# Altium PCB HuaYanggui.PcbDoc
Units mil, origin at the board's own origin, x right, y up, seen from the top; angles counter-clockwise.
Board outline 2372.23 x 2949.09 mil, 2 copper layers (Top Layer, Bottom Layer); 30 components, 22 nets, 156 pads, 5 vias.
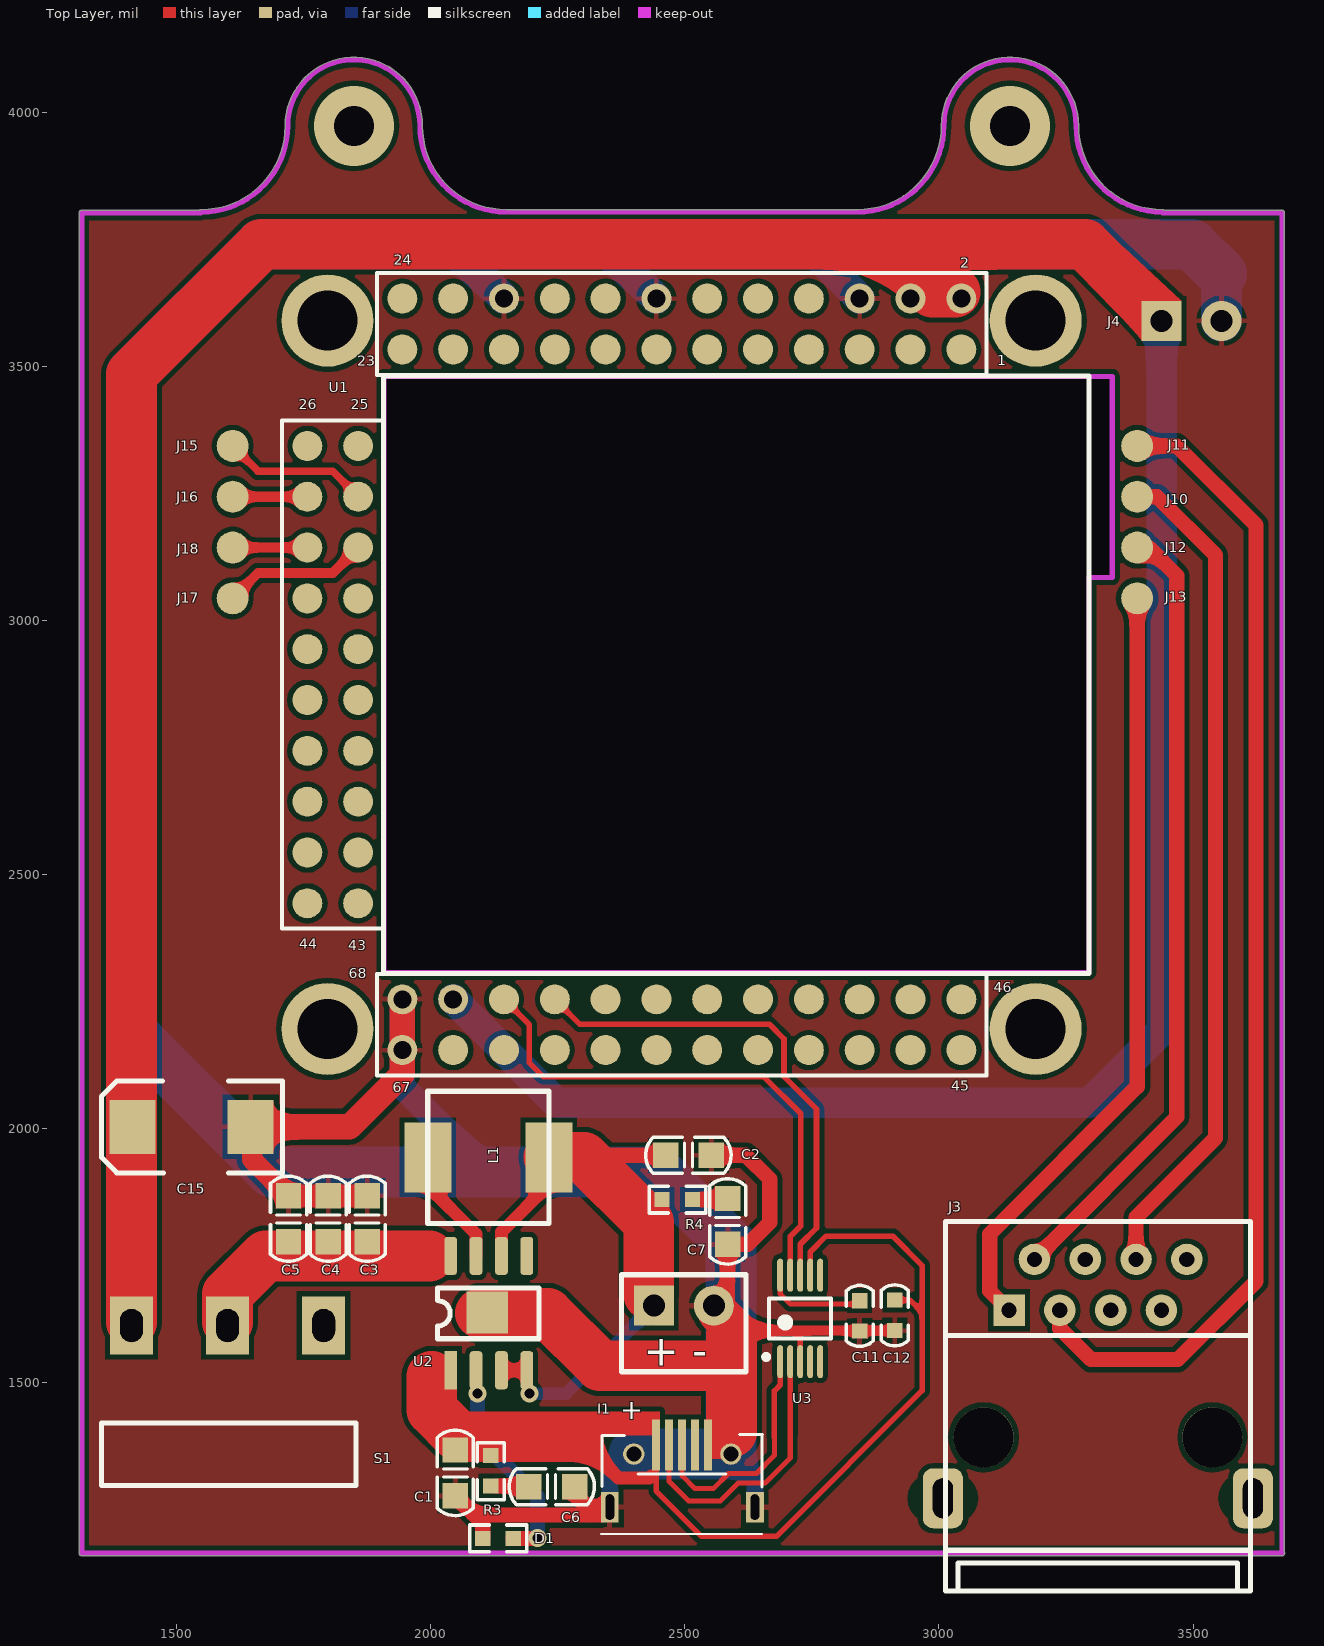
[diagram p0: Top Layer view]
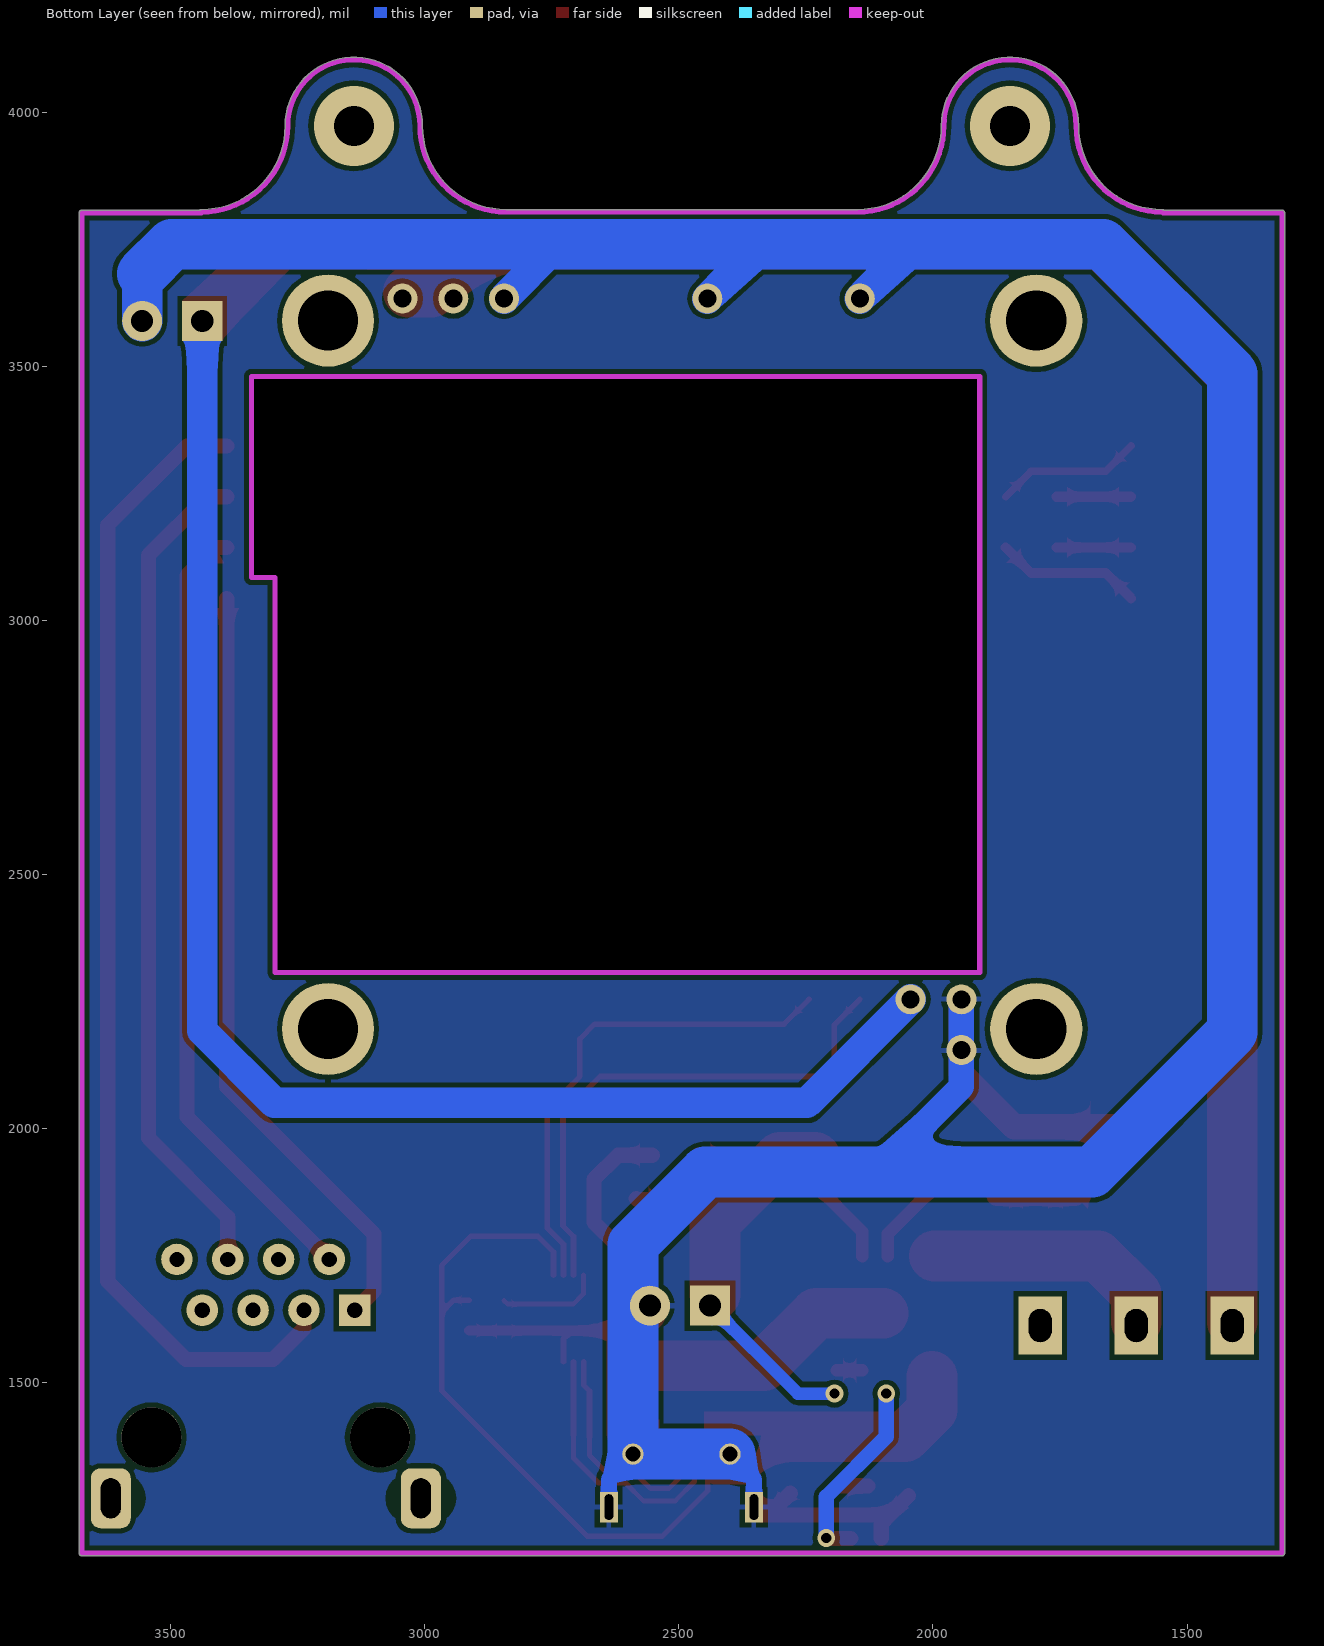
[diagram p1: Bottom Layer view, seen from below]
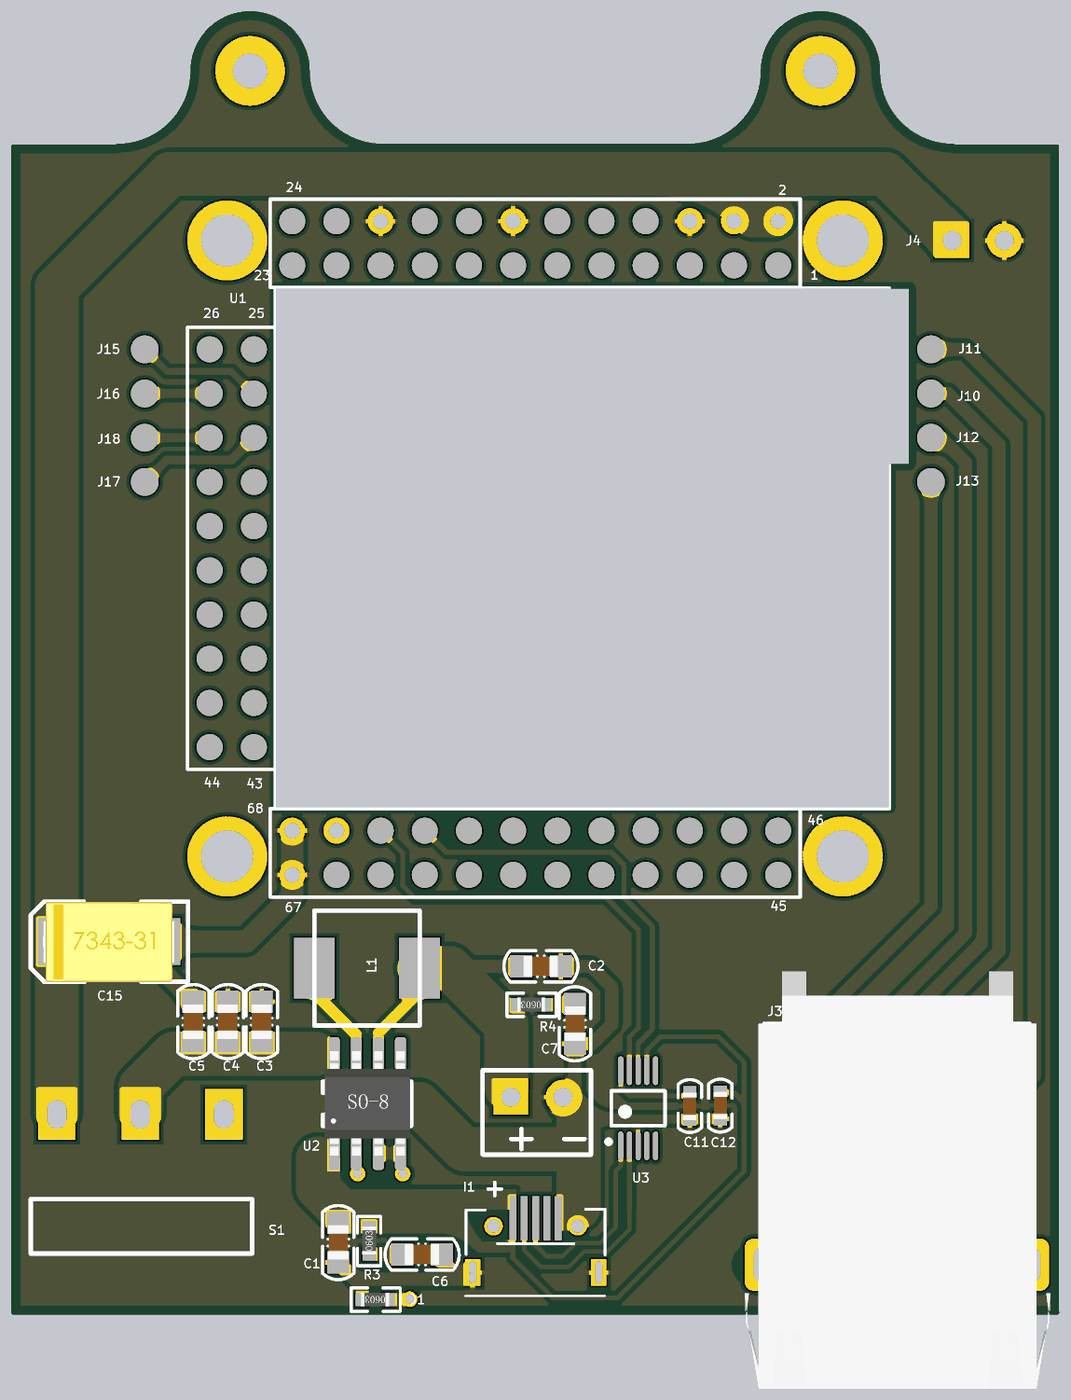
[diagram p2: 3D render of the assembled board from above, using the file's embedded part models]

## Layer stack, top to bottom
Top Solder: solder mask 0.4, Solder Resist, Dk 3.5
Top Layer: signal copper 1.4
Dielectric 1: dielectric 12.6, FR-4, Dk 4.8
Bottom Layer: signal copper 1.4
Bottom Solder: solder mask 0.4, Solder Resist, Dk 3.5

## Board outline
1307.98,1165 ccw(c1313,1165) 1313,1159.98 3675.2,1159.98 ccw(c3675.2,1165) 3680.22,1165 ccw(c3675.2,1165) 3680.01,1166.42 3680.01,3802.8 ccw(c3675,3802.8) 3675,3807.81 3443.1,3807.81 ccw(c3439.7,3804.13) 3439.7,3809.14 cw(c3439.7,3974.05) 3274.79,3974.05 ccw(c3269.77,3974.05) 3274.79,3974.05 ccw(c3269.77,3974.05) 3274.79,3974.05 ccw(c3139.77,3974.05) 3004.76,3974.05 cw(c2839.77,3974.05) 2839.77,3809.07 2148.43,3809.07 cw(c2148.43,3974.05) 1983.45,3974.05 ccw(c1848.43,3974.05) 1713.42,3974.05 cw(c1548.43,3974.05) 1548.43,3809.07 ccw(c1548.43,3804.05) 1545.11,3807.81 1313,3807.81 ccw(c1313,3802.8) 1307.98,3802.8
cut-out: 1907,2308 1907,3481 3340,3481 3340,3085 3294,3085 3294,2308

## Design rules (kind name [scope] priority, off if disabled: settings)
Clearance [All] p1: gap=10 ignorepadtopadclearanceinfootprint=FALSE
ComponentClearance [All] p1: gap=0 collisioncheckmode=3 verticalgap=0 showdistances=FALSE
DiffPairsRouting [All] p1: maxlimit=10 minlimit=8 mostfreqgap=10 toplayer_minwidth=15 toplayer_maxwidth=15 toplayer_prefwidth=15 bottomlayer_minwidth=15 bottomlayer_maxwidth=15 bottomlayer_prefwidth=15 maxuncoupledlength=500
HoleSize [All] p1: absolutevalues=TRUE maxlimit=100 minlimit=12 maxpercent=80.000 minpercent=20.000
NetAntennae [All] p1: netantennaetolerance=10
PolygonConnect [All] p1: connectstyle=Relief reliefconductorwidth=10 reliefentries=4 polygonreliefangle="90 Angle" airgapwidth=10
RoutingVias [All] p1: holewidth=28 width=50 viastyle="Through Hole" minholewidth=28 minwidth=50 maxholewidth=28 maxwidth=50
SolderMaskExpansion [All] p1: expansion=4
Width [All] p1: maxlimit=200 minlimit=8 preferedwidth=10 minimp=50.000000 maximp=50.000000 favimp=50.000000
26 further rules are at their usual default settings.

## Components (designator, comment, footprint, x,y, rotation, side; value= is the part's Value field where it differs from the comment)
"+ -" "Power" "Power 2" 2438.89,1652 r0 top (schematic designator J2)
C1 "Cap Semi" C0805 2048,1278 r90 top value=10uF
C2 "Cap Semi" C0805 2552,1948 r180 top value=10uF
C3 "Cap Semi" C0805 1875,1868 r270 top value=22uF
C4 "Cap Semi" C0805 1798,1868 r270 top value=22uF
C5 "Cap Semi" C0805 1720,1868 r270 top value=22uF
C6 "Cap Semi" C0805 2283,1296 r180 top value=10uF
C7 "Cap Semi" C0805 2584,1773 r90 top value=10uF
C11 "Cap Semi" C0603 2844,1662 r270 top value=0.1uF
C12 "Cap Semi" C0603 2913,1603 r90 top value=0.1uF
C15 "Cap Pol2" C7343 1413,2004 r0 top value=220uF
D1 "LED2" R0603 2162,1194 r180 top
I1 "MicroUSB" MICROUSB 2495,1360 r270 top locked
J3 "RJ45-1" RG45-3 3312.88,1393.08 r180 top locked
J4 "Power" "Power 2" 3438,3590 r0 top
J10 "PAD" PAD#1 3388,3125 r270 top
J11 "PAD" PAD#2 3389,3345 r270 top
J12 "PAD" PAD#3 3388,3007 r270 top
J13 "PAD" PAD#4 3390,2902 r270 top (schematic designator 13)
J15 "PAD" PAD#5 1593,3345 r90 top locked
J16 "PAD" PAD#6 1595,3243 r90 top
J17 "PAD" PAD#7 1593,2990 r90 top
J18 "PAD" PAD#8 1588,3123 r90 top
L1 "Inductor" L0630 1994,1944 r0 top value=1uH
R3 "Res2" R0603 2118,1297 r90 top value=2R
R4 "Res2" R0603 2515,1861 r180 top value=2R
S1 "Switch" SwitchA 1600,1613 r270 top locked
U1 "NanoPi NEO Core" NANOPI_NEO_CORE3 3281,3681 r270 top locked
U2 "IP5306" eSOP8 2111,1638.5 r90 top
U3 "CH340E" MSOP-10 2727,1627 r90 top

## Footprints (in the part's own frame and the unit in brackets; to place one, negate y for a bottom-side part, rotate by r counter-clockwise, add the part's x,y. Pads: shape width x height; smd on the part's side, far side on the other; paste and mask are expansions set on the pad)
C0603 [mil]
  rect 30x30 smd: 1(0,0) 2(60,0)
  silkscreen extent -30,-27 90,27, body extent -1,-16 62,15, height 24
C0805 [mil]
  rect 50x50 smd: 1(0,0) 2(90,0)
  silkscreen extent -39,-36 129,36, body extent 6,-24 85,23, height 47
C7343 [mm]
  rect 2.286x2.7 smd: 1(0,0) 2(5.9,0)
  silkscreen extent -1.55,-2.3 7.5,2.3, body extent -0.86,-2.33 6.74,2.27, height 3.1
eSOP8 [mil]
  round 20 on Top Overlay: 0(-29.5,59.8)
  rect 75x25 smd: 1(-113.5,72)
  rrect50% 75x25 smd: 2(-113.5,22) 3(-113.5,-28) 4(-113.5,-78) 5(111.5,-78) 6(111.5,-28) 7(111.5,22) 8(111.5,72)
  rect 82.28x82.28 smd: 9(0,0)
  silkscreen extent -52,-102 49,98, body extent -119,-99 117,93
L0630 [mm]
  rect 2.35x3.5 smd: 1(0,0) 2(6.05,0)
  silkscreen extent 0,-3.3 6.05,3.3
MICROUSB [mil]
  round 42 hole 29.53 unplated: 0(0,95.47) 0(0,-95.47)
  rect 60x35 hole 17 slot 50 at 0 deg: 0(104.33,142.72) 0(104.33,-142.72)
  rect 100x15.75 smd: 1(-18,-51.47) 2(-18,-25.87) 3(-18,-0.28) 4(-18,25.31) 5(-18,50.9)
  silkscreen extent -39,-160 158,157
MSOP-10 [mil]
  oval 65x11.81 smd: 1(-85,39.37) 2(-85,19.69) 3(-85,0) 4(-85,-19.68) 5(-85,-39.37) 6(85,-39.37) 7(85,-19.68) 8(85,0) 9(85,19.69) 10(85,39.37)
  silkscreen extent -81,-61 39,72, body extent -55,-61 55,61, height 79
NANOPI_NEO_CORE3 [mm]
  round 1.5 smd: 1(3.734,-6.02) 3(3.734,-8.56) 5(3.734,-11.1) 7(3.734,-13.64) 8(1.194,-13.64) 9(3.734,-16.18) 10(1.194,-16.18) 11(3.734,-18.72) 12(1.194,-18.72) 13(3.734,-21.26) 15(3.734,-23.8) 16(1.194,-23.8) 17(3.734,-26.34) 18(1.194,-26.34) 19(3.734,-28.88) 21(3.734,-31.42) 22(1.194,-31.42) 23(3.734,-33.96) 24(1.194,-33.96) 25(8.56,-36.17) 26(8.56,-38.71) 27(11.1,-36.17) 28(11.1,-38.71) 29(13.64,-36.17) 30(13.64,-38.71) 31(16.18,-36.17) 32(16.18,-38.71) 33(18.72,-36.17) 34(18.72,-38.71) 35(21.26,-36.17) 36(21.26,-38.71) 37(23.8,-36.17) 38(23.8,-38.71) 39(26.34,-36.17) 40(26.34,-38.71) 41(28.88,-36.17) 42(28.88,-38.71) 43(31.42,-36.17) 44(31.42,-38.71) 45(38.76,-6.02) 46(36.22,-6.02) 47(38.76,-8.56) 48(36.22,-8.56) 49(38.76,-11.1) 50(36.22,-11.1) 51(38.76,-13.64) 52(36.22,-13.64) 53(38.76,-16.18) 54(36.22,-16.18) 55(38.76,-18.72) 56(36.22,-18.72) 57(38.76,-21.26) 58(36.22,-21.26) 59(38.76,-23.8) 60(36.22,-23.8) 61(38.76,-26.34) 62(36.22,-26.34) 63(38.76,-28.88) 64(36.22,-28.88) 65(38.76,-31.42)
  round 1.5 hole 0.9: 2(1.194,-6.02) 4(1.194,-8.56) 6(1.194,-11.1) 14(1.194,-21.26) 20(1.194,-28.88) 66(36.22,-31.42) 67(38.76,-33.96) 68(36.22,-33.96)
  round 4.6 hole 3: 70(2.3,-2.3) 71(37.7,-2.3) 72(2.3,-37.7) 73(37.7,-37.7)
  silkscreen extent -0.08,-39.98 40.03,0.36
PAD#1 [mil]
  round 62.99 smd: 1(-119,2)
PAD#2 [mil]
  round 62.99 smd: 1(1,1)
PAD#3 [mil]
  round 62.99 smd: 1(-137,2)
PAD#4 [mil]
  round 62.99 smd: 1(-142,0)
PAD#5 [mil]
  round 62.99 smd: 1(-1,-17)
PAD#6 [mil]
  round 62.99 smd: 1(1,-15)
PAD#7 [mil]
  round 62.99 smd: 1(54,-17)
PAD#8 [mil]
  round 62.99 smd: 1(21,-22)
"Power 2" [mm]
  rect 2x2 hole 1.1: 1(0,0)
  round 2 hole 1.1: 2(3,0)
R0603 [mil]
  rect 30x30 smd: 1(0,0) 2(60,0)
  silkscreen extent -27,-27 85,27, body extent -1,-16 62,15, height 18
RG45-3 [mil]
  rrect50% 78.74x118.11 hole 78.74 slot 39.37 at 0 deg: 0(-305.12,120.08)
  round 118.11 hole 118.11: 0(-225,0) 0(225,0)
  rrect50% 78.74x118 hole 78.74 slot 39.37 at 0 deg: 0(305.12,120.08)
  rect 62x62 hole 30: 1(175,-250)
  round 62 hole 30: 2(125,-350) 3(75,-250) 4(25,-350) 5(-25,-250) 6(-75,-350) 7(-125,-250) 8(-175,-350)
  silkscreen extent -300,-425 300,302, body extent -348,-543 345,401, height 573
SwitchA [mil]
  rect 115x85 hole 45 slot 65 at 0 deg: 1(0,0) 2(0,188.98) 3(0,-188.98)
  silkscreen extent 192,-248 315,253

## Part data
C1 C2 C3 C4 C5 C6 C7 C11 C12: "Capacitor (Semiconductor SIM Model)", LatestRevisionDate=29-May-2009, LatestRevisionNote="IPC-7351 Footprint Added.", PackageDescription="Chip Capacitor", PackageReference=C1206, Published=8-Jun-2000, Publisher="Altium Limited"
C15: "Polarized Capacitor (Axial)", LatestRevisionDate=17-Jul-2002, LatestRevisionNote="Re-released for DXP Platform.", PackageDescription="Polarized Capacitor; 2 Leads", PackageReference=POLAR0.8, Published=8-Jun-2000, Publisher="Altium Limited"
D1: "Typical RED, GREEN, YELLOW, AMBER GaAs LED", LatestRevisionDate=17-Jul-2002, LatestRevisionNote="Re-released for DXP Platform.", PackageDescription="SM LED; 2 Flat Leads", PackageReference=3.2X1.6X1.1, PackageVersion=Feb-2002, Published=8-Jun-2000, Publisher="Altium Limited"
J3: library part RJ45-3
R3 R4: "Resistor", LatestRevisionDate=17-Jul-2002, LatestRevisionNote="Re-released for DXP Platform.", PackageDescription="Axial Device, Thru-Hole; 2 Leads; 0.4 in Pin Spacing", PackageReference=AXIAL-0.4, Published=8-Jun-2000, Publisher="Altium Limited"
U1: library part NanoPi_NEO_Core
L1: Code_IEC=1005, Code_JEITA=0402, LatestRevisionDate=29-May-2009, LatestRevisionNote="IPC-7351 Footprint Added.", PackageDescription="Chip Inductor", PackageReference=0402-A, Published=8-Jun-2000, Publisher="Altium Limited"

## Via types
v1: diameter 35, hole 20, Top Layer to Bottom Layer, 3 vias
v2: diameter 157.48, hole 78.74, Top Layer to Bottom Layer, 2 vias

## Nets (pads, with @x,y where several pads share a name; then routed paths per layer and width w, separated by ;. In a path a pad name is that pad's centre, name@x,y a point inside that pad or via, vN(x,y) a via of type N, cw(c..) or ccw(c..) an arc to the next point about the centre after c; other vN are vias at no path point)
GND: "+ -.2" C1.1 C2.1 C3.1 C4.1 C5.1 C6.1 C7.1 C11.2 C12.1 C15.2 D1.2 I1.0 I1.5 J4.2 U1.6 U1.14 U1.20 U1.67 U1.68 U2.9 U3.3 | length 9631.6
  Top Layer w11: 2711,1603 2727,1587 U3.3
  Top Layer w20: 2601,1603 2711,1603 C12.1
  Top Layer w30: C1.1 2086,1240 ; D1.2 2102,1224 2086,1240 ; C6.1@2281,1283 2308.33,1255.67 2352.28,1255.67 2336.61,1240 2086,1240 ; C2.1 2620,1948 2667,1901 2667,1816 2624,1773 C7.1 2584,1657 2565.5,1638.5
  Top Layer w40: C15.2@1648.28,2004 1648.28,1939.72 C5.1 C4.1 C3.1
  Top Layer w50: C15.2@1648.28,2004 1840,2004 1944,2108 U1.67 U1.68
  Top Layer w80: 2565.5,1638.5 2601,1603 ; 2584,1603 2592,1595 ; 2585,1396 2592,1403
  Top Layer w100: U2.9@2098,1637 2230,1637 2333,1534 2592,1534 2592,1403 ; 2592,1538 2592,1595
  Bottom Layer w30: I1.0@2352.28,1255.67 2352.28,1312.76 I1.0@2399.53,1360 ; I1.0@2590.47,1360 2637.72,1312.76 I1.0@2637.72,1255.67
  Bottom Layer w50: U1.68 U1.67 1944,2083 2112,1915
  Bottom Layer w60: 2037,3740.8 2037.2,3740.8 U1.20 ; 2326,3740.8 2337.2,3740.8 U1.14 ; 2747,3740.8 2747,3731 U1.6
  Bottom Layer w80: J4.2 3556.11,3682.89
  Bottom Layer w100: 2037,3740.8 1665.8,3740.8 1411,3486 1411,2191 1687,1915 2112,1915 2448,1915 2590.47,1772.53 2590.47,1360 I1.0@2399.53,1360 ; 2037.2,3740.8 2326,3740.8 ; 2337.2,3740.8 2747,3740.8 3498.2,3740.8 3556.11,3682.89
LAN_RX+: J17.1 U1.29 | length 288.4
  Top Layer w20: J17.1 1660,3094 1807,3094 U1.29
LAN_RX-: J18.1 U1.30 | length 147
  Top Layer w20: J18.1 U1.30
LAN_TX+: J15.1 U1.27 | length 288.4
  Top Layer w15: J15.1 1660,3294 1807,3294 U1.27
LAN_TX-: J16.1 U1.28 | length 147
  Top Layer w20: J16.1 U1.28
Net13_1: J3.1 J13.1 | length 1536.7
  Top Layer w30: J3.1 3100,1680.96 3100,1793 3390,2083 J13.1
NetC1_2: C1.2 C12.2 I1.1 R3.2 U2.1 U3.7 | length 1938
  Top Layer w11: I1.1 2443.53,1287.47 2533,1198 2680,1198 2967,1485 2967,1639 ; U3.7 2746.68,1757.68 2778,1789 2909,1789 2967,1731 2967,1639 ; C12.2 2943,1663 2967,1639
  Top Layer w25: 2288,1394 2369,1313 2430,1313 2434,1317
  Top Layer w100: 2002,1513 2002,1447 2055,1394 2288,1394
NetC2_2: "+ -.1" C2.2 L1.2 R4.2 U2.3 U2.4 U2.6 | length 1153.6
  Top Layer w25: U2.3 U2.4 ; U2.6 2139,1797 2232.19,1890.19 L1.2
  Top Layer w30: 2301,1944 2305,1948 C2.2
  Top Layer w100: L1.2 2301,1944 2429,1816 2429,1674
  Bottom Layer w25: v1(2194,1479) 2265.89,1479 2438.89,1652
NetC3_2: C3.2 C4.2 C5.2 S1.1 U2.8 | length 483.1
  Top Layer w100: S1.1@1600,1620 1600,1675 1675,1750 1798,1750 1997,1750
NetC6_2: C6.2 R3.1 | length 51
  Top Layer w30: R3.1@2128,1297 C6.2@2179,1297
NetC7_2: C7.2 R4.1 | length 69.8
  Top Layer w30: R4.1 2582,1861 C7.2
NetC11_1: C11.1 U3.10 | length 204.3
  Top Layer w10: U3.10 2687.63,1675.37 2708,1655 2837,1655 C11.1
NetC15_1: C15.1 J4.1 S1.3 U1.2 U1.4 U1.66 | length 7154
  Top Layer w100: S1.3@1411.02,1620 1411.02,3485.02 1666.8,3740.8 2893.2,3740.8 ; U1.2@3032,3647 2987,3647 2893.2,3740.8 ; J4.1@3425,3603 3287.2,3740.8 2893.2,3740.8
  Bottom Layer w60: U1.66 2248,2051 3296,2051 3438,2193 J4.1
NetD1_1: D1.1 U2.2 | length 381.3
  Top Layer w30: D1.1 2209,1194 v1(2210,1195)
  Bottom Layer w30: v1(2092,1479) 2092,1394 2210,1276 v1(2210,1195)
NetJ3_2: J3.2 J12.1 | length 1562.7
  Top Layer w30: J3.2 3468,2023.2 3468,3089 3413,3144 J12.1
NetJ3_3: J3.3 J11.1 | length 2297.8
  Top Layer w30: J3.3 3237.88,1607.12 3299,1546 3470,1546 3624,1700 3624,2884 3624,3188 3468,3344 J11.1
NetJ3_6: J3.6 J10.1 | length 1652.2
  Top Layer w30: J3.6 3387.88,1825.88 3544,1982 3544,3129 3429,3244 J10.1
NetL1_1: L1.1 U2.7 | length 233.4
  Top Layer w25: L1.1 1994,1888 2089,1793 U2.7
RXD0: U1.62 U3.8 | length 988.1
  Top Layer w11: U1.62 2293,2206 2666,2206 2695,2177 2695,2103 2759,2039 2759,1805 2727,1773 U3.8
TXD0: U1.64 U3.9 | length 1047.7
  Top Layer w11: U1.64 2194,2205 2194,2130 2221,2103 2655,2103 2728,2030 2728,1809 2707.31,1788.31 U3.9
UD+: I1.3 U3.1 | length 469.2
  Top Layer w10: I1.3 2494.72,1317.28 2520,1292 2556,1292 2586,1322 2641,1322 2676,1357 2676,1393
  Top Layer w11: 2676,1393 2676,1484.28 2687.63,1495.91 U3.1
UD-: I1.2 U3.2 | length 550.5
  Top Layer w10: I1.2 2469.13,1306 2507.13,1268 2570,1268 2605,1303 2658,1303 2707.31,1352.31 2707.31,1397
  Top Layer w11: 2707.31,1397 U3.2
pads on no net: I1.4 J3.0 J3.4 J3.5 J3.7 J3.8 S1.2 U1.1 U1.3 U1.5 U1.7 U1.8 U1.9 U1.10 U1.11 U1.12 U1.13 U1.15 U1.16 U1.17 U1.18 U1.19 U1.21 U1.22 U1.23 U1.24 U1.25 U1.26 U1.31 U1.32 U1.33 U1.34 U1.35 U1.36 U1.37 U1.38 U1.39 U1.40 U1.41 U1.42 U1.43 U1.44 U1.45 U1.46 U1.47 U1.48 U1.49 U1.50 U1.51 U1.52 U1.53 U1.54 U1.55 U1.56 U1.57 U1.58 U1.59 U1.60 U1.61 U1.63 U1.65 U1.70 U1.71 U1.72 U1.73 U2.0 U2.5 U3.4 U3.5 U3.6
copper on no net:
  other v2: 1848.43,3974.05 3139.77,3974.05

## Polygon pours and split planes (outlines as drawn)
GND on Top Layer "GND_L01_P038" (solid, pour order 38): 1313,3802.8 1314.26,3804.05 1574.06,3804.05 1578,3808 1596,3808 1604,3816 1617,3816 1628,3827 1637,3827 1649,3839 1655,3839 1688,3872 1688,3881 1698,3891 1698,3898 1705,3905 1705,3913 1714,3922 1714,3940 1719,3945 1719,3973.49 1718.43,3974.05 1720,3975.62 1720,4005 1729,4014 1729,4035 1754,4060 1754,4065 1756,4065 1779,4088 1789,4088 1804,4103 1849,4103 1851,4105 1854,4102 1885,4102 1897,4090 1911,4090 1938,4063 1944,4063 1944,4059 1965,4038 1965,4025 1975,4015 1975,3989 1979,3985 1978.43,3984.43 1978.43,3949.57 1983,3945 1982,3944 1982,3927 1989,3920 1989,3907 2006,3890 2006,3878 2037,3847 2037,3845 2039,3845 2054,3830 2065,3830 2077,3818 2091,3818 2101,3808 2133,3808 2138,3803 2140,3805 2881,3805 2895,3819 2920,3819 2944,3843 2953,3843 2979,3869 2979,3883 2996,3900 2996,3919 3007,3930 3007,3956 3009.77,3958.77 3009.77,3992.77 3015,3998 3015,4022 3034,4041 3034,4052 3060,4078 3068,4078 3089,4099 3132,4099 3138,4105 3168,4105 3181,4092 3200,4092 3219,4073 3226,4073 3249,4050 3249,4038 3265,4022 3265,3978.83 3273,3970.83 3273,3934 3282,3925 3282,3902 3297,3887 3297,3878 3326,3849 3326,3847 3330,3847 3353,3824 3365,3824 3365,3823 3370,3818 3380,3818 3388,3810 3413,3810 3420.2,3802.8 3675,3802.8 3675,1165 1313,1165
no net on Top Layer "NONET_L01_P036" (hatched Horizontal grid 20 track 8, pour order 36): 1313,3802.8
no net on Top Layer "NONET_L01_P034" (hatched Horizontal grid 20 track 8, pour order 34): 2538,1427
no net on Top Layer "Top Layer-No Net 2" (solid, pour order 30): 3595.29,3135.12
no net on Top Layer "Top Layer-No Net 2" (solid, pour order 6): 1312,3135
GND on Bottom Layer "GND_L02_P040" (solid, pour order 40): 1547.17,3802.8 1551.38,3807 1587,3807 1592,3812 1608,3812 1618,3822 1632,3822 1632,3823 1648,3839 1656,3839 1668,3851 1668,3855 1682,3869 1682,3873 1698,3889 1698,3899 1708,3909 1708,3925 1714,3931 1714,3947 1717,3950 1717,3972.62 1720,3975.62 1720,4004 1724,4008 1724,4023 1737,4036 1737,4045 1762,4070 1763,4070 1787,4094 1807,4094 1815,4102 1842,4102 1844,4104 1874,4104 1882,4096 1899,4096 1908,4087 1918,4087 1939,4066 1941,4066 1941,4065 1963,4043 1963,4029 1974,4018 1974,3992 1978.43,3987.57 1978.43,3943.57 1984,3938 1984,3923 1992,3915 1992,3906 1998,3900 1998,3892 2014,3876 2014,3866 2017,3866 2036,3847 2036,3846 2041,3846 2058,3829 2064,3829 2079,3814 2101,3814 2110,3805 2137,3805 2138,3804 2853.95,3804.05 2856,3806 2884,3806 2894,3816 2912,3816 2926,3830 2934,3830 2949,3845 2954,3845 2954,3847 2974,3867 2974,3871 2984,3881 2984,3891 2995,3902 2995,3916 3006,3927 3006,3947 3008,3949 3008,3972.28 3011,3975.28 3011,4006 3020,4015 3020,4031 3032,4043 3032,4053 3051,4072 3056,4072 3074,4090 3091,4090 3103,4102 3134,4102 3136,4104 3137,4103 3177,4103 3190,4090 3206,4090 3223,4073 3225,4073 3248,4050 3248,4042 3258,4032 3258,4022 3266,4014 3266,4001 3269,3998 3269,3982 3270,3981 3270,3951 3274,3947 3274,3931 3279,3926 3279,3915 3285,3909 3285,3899 3296,3888 3296,3881 3308,3869 3308,3867 3344,3831 3355,3831 3370,3816 3386,3816 3394,3808 3419,3808 3424.2,3802.8 3664.8,3802.8 3674.83,3802.8 3675.2,1165 1313,1165 1315,1167 1315,3802.8

## Keep-outs
Keep-Out Layer:
  pour cut-out: 1908,2308 1908,3481 3341,3481 3341,3085 3295,3085 3295,2308
  lines w0: 3596,1165 3597,1166
  lines w10: 1547.17,3802.8 1313,3802.8 1313,1165 3675.2,1165 ; 1548.43,3804.05 ccw(c1548.43,3974.05) 1718.43,3974.05 cw(c1848.43,3974.05) 1978.43,3974.05 ccw(c2148.43,3974.05) 2148.43,3804.05 2839.77,3804.05 ccw(c2839.77,3974.05) 3009.77,3974.05 cw(c3139.77,3974.05) 3269.77,3974.05 ccw(c3439.7,3974.05) 3439.7,3804.13 ; 3439.7,3802.8 3675,3802.8 3675,1165 ; 1908,2308 1908,3481 3295,3481 3341,3481 3341,3085 3295,3085 3295,2308 1908,2308 ; 1908,2308 1908,2308

## Other copper
Top Layer:
  rectangle net NetC1_2: 2272,1397 2451,1444
  rectangle net GND: 2538,1350 2610,1428
  region: 2049,1563

## Silkscreen, mask and mechanical layers (free items; w line width, h text height)
Top Overlay:
  lines w10: 2375,1522 2375,1713 2620,1713 2620,1522 2375,1522
Top Solder:
  lines w25: 1994,1888 2089,1793 ; 2139,1797 2232.19,1890.19

## Text inside footprints (layer, text, board x,y; h text height)
I1: Top Overlay "+" at 2373,1429 h39.37
U1: Top Overlay "23" at 1855,3502 h20; Top Overlay "24" at 1927,3701 h20; Top Overlay "1" at 3115,3503 h20; Top Overlay "2" at 3042,3695 h20; Top Overlay "25" at 1842,3416 h20; Top Overlay "26" at 1740,3416 h20; Top Overlay "44" at 1741,2354 h20; Top Overlay "43" at 1838,2352 h20; Top Overlay "46" at 3108,2269 h20; Top Overlay "45" at 3024,2075 h20; Top Overlay "68" at 1839,2296 h20; Top Overlay "67" at 1925,2072 h20